# Altium PCB PCB2.PcbDoc
Units mil, origin at the board's own origin, x right, y up, seen from the top; angles counter-clockwise.
Board outline 6000 x 4000 mil, 2 copper layers (Top Layer, Bottom Layer); 91 components, 66 nets, 331 pads, 2 vias.
Unrouted connection lines stored in the file: 183.
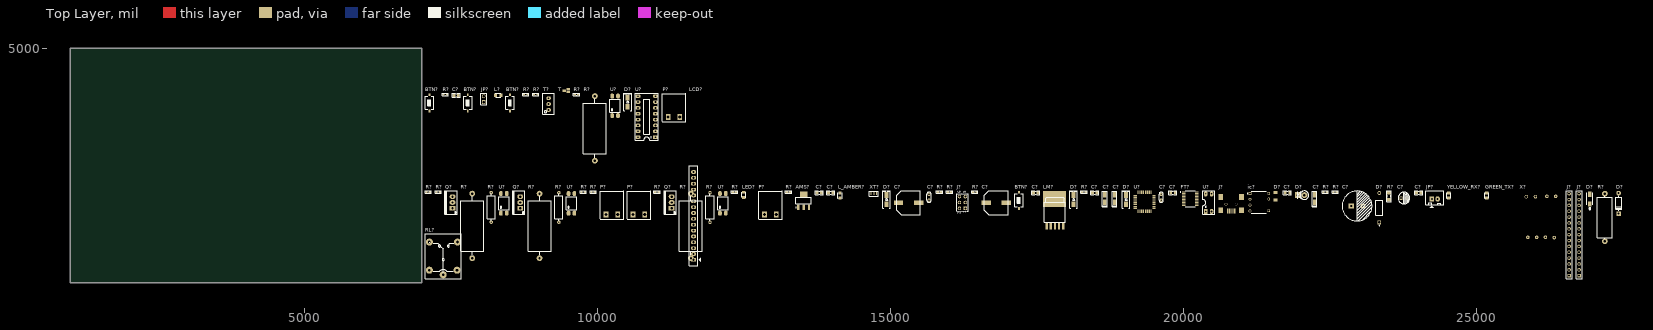
[diagram p0: Top Layer view]
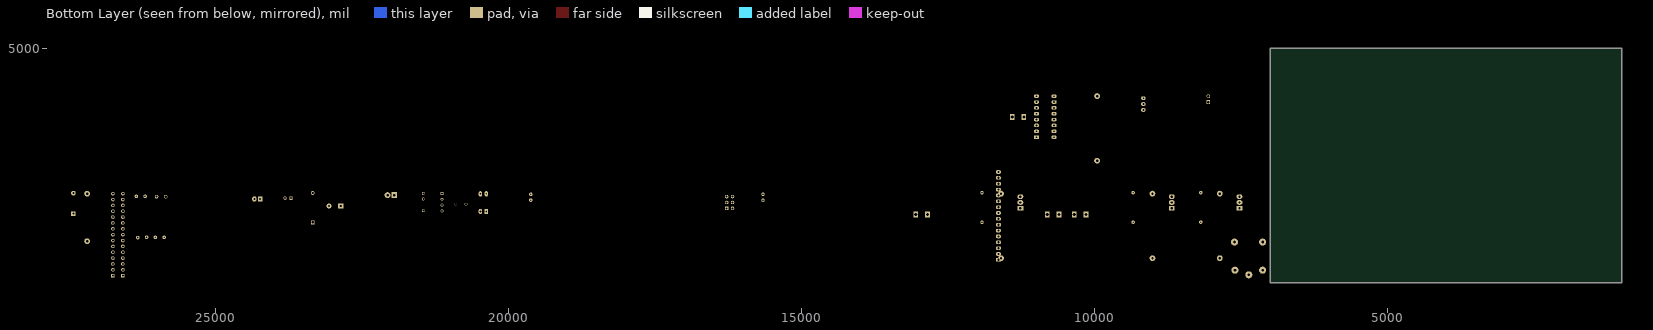
[diagram p1: Bottom Layer view, seen from below]

## Layer stack, top to bottom
Top Solder: solder mask 0.4, Solder Resist, Dk 3.5
Top Layer: signal copper 1.4
Dielectric 1: dielectric 12.6, FR-4, Dk 4.8
Bottom Layer: signal copper 1.4
Bottom Solder: solder mask 0.4, Solder Resist, Dk 3.5

## Board outline
1000,1000 7000,1000 7000,5000 1000,5000

## Design rules (kind name [scope] priority, off if disabled: settings)
Clearance [All] p1: gap=10 ignorepadtopadclearanceinfootprint=FALSE except(0: Arc-Hole Track-Hole SMDPad-Hole THPad-Hole Via-Hole Fill-Hole Poly-Hole Region-Hole Text-Hole)
PolygonConnect [All] p1: connectstyle=Relief reliefconductorwidth=10 reliefentries=4 polygonreliefangle="90 Angle" airgapwidth=10
RoomDefinition Sheet2 [InComponentClass('Sheet2')] p1: confinementstyle=ConfineIn formatcopy=TRUE lockcomponents=FALSE outline 7045,1060 27510,1060 27510,2680 7045,2680
RoutingVias [All] p1: holewidth=28 width=50 viastyle="Through Hole" minholewidth=28 minwidth=50 maxholewidth=28 maxwidth=50
SolderMaskExpansion [All] p1: expansion=4 istentingtop=FALSE
Width [All] p1: maxlimit=10 minlimit=10 preferedwidth=10
30 further rules are at their usual default settings.

## Classes and differential pairs
component class Sheet2: AMS? BTN? C? D? FT? GREEN_TX? ic? J? JP? L? L_AMBER? LCD? LED? LM? P? Q? R? RL? T T? U? X? XT? YELLOW_RX?

## Components (designator, comment, footprint, x,y, rotation, side; value= is the part's Value field where it differs from the comment)
AMS? "AMS1117-3.3V" SOT223 13520,2400 r0 top value="AMS1117-3.3V SOT223"
BTN? "Nut Nhan 2 Chan SMD 3x6x2.5" "Nut Nhan 2 Chan SMD 3x6x2.5" 8505,4070 r90 top
BTN? "Nut Nhan 2 Chan SMD 3x6x2.5" "Nut Nhan 2 Chan SMD 3x6x2.5" 7130,4070 r90 top
BTN? "Nut Nhan 2 Chan SMD 3x6x2.5" "Nut Nhan 2 Chan SMD 3x6x2.5" 7785,4070 r90 top
BTN? "Nut Nhan 2 Chan SMD 3x6x2.5" "Nut Nhan 2 Chan SMD 3x6x2.5" 17195,2405 r90 top
C? "104" "tu 0805" 7585,4200 r0 top
C? "0.1uF" "tu 0805" 24020,2535 r0 top
C? "0.1uF" "tu 0805" 18490,2535 r0 top
C? "15pF" "tu 0805" 13980,2535 r0 top
C? "4.7uF" "tu tantalum smd3216" 18830,2440 r90 top
C? "15pF" "tu 0805" 13785,2535 r0 top
C? "104" "tu gom" 19625,2460 r90 top
C? "106" "tu gom" 15660,2460 r90 top
C? "47uF" "tu hoa 5mm" 23770,2445 r0 top
C? "1000uF" "tu nhom 10 (G)" 16810,2365 r0 top
C? "470uF" "tu nhom 10 (G)" 15310,2365 r0 top
C? "4.7uF" "tu tantalum smd3216" 22245,2440 r90 top
C? "0.1uF" "tu 0805" 17480,2535 r0 top
C? "0.1uF" "tu 0805" 19825,2535 r0 top
C? "10uF" "tu hoa 13mm" 22970,2310 r0 top
C? "0.1uF" "tu 0805" 21780,2535 r0 top
C? "4.7uF" "tu tantalum smd3216" 18660,2440 r90 top
D? "M7" "DIODE SMA" 10515,4085 r90 top
D? "12V" "DIODE ZENNER SMD SOD80" 21575,2475 r90 top
D? "P6KE200A" DIOAD1276W78L760D360 23350,2280 r90 top
D? "1N4007" D1A 27435,2530 r90 top
D? "SS34" "DIODE SMA" 14935,2420 r90 top
D? "SS34" "DIODE SMA" 19025,2420 r90 top
D? "2A 1000v" "DIODE 2A DUNG" 22010,2495 r0 top
D? "MBRA160T3G" DIOM5226X220N 26945,2430 r90 top
D? "SS34" "DIODE SMA" 18130,2420 r90 top
FT? "FT232RL" PCM5101APW 3655,8600 r0 top
GREEN_TX? "LED2" LED-0805-Green 25185,2445 r90 top
ic? "TNY266_2" DIP762W46P254L957H406Q7 21290,2375 r0 top
J? "USB Micro 5p SMD" "USB Mini 5p SMD" 20815,2360 r0 top
J? "HEAD15-NOSS" HDR1X15 26590,1120 r90 top
J? "Header 3X2" HDR2X3 16280,2270 r90 top
J? "HEAD15-NOSS-1" HDR1X15 26760,1120 r90 top
JP? "JP 1x2 2.54" "JP 1x2 DT" 8055,4085 r90 top
JP? "JP2" CON2 24245,2430 r0 top value="Connector 2"
L? "LED 0805" LED-0805-Green 8260,4200 r0 top
L_AMBER? "LED3" LED-0805-Red 14140,2445 r90 top
LCD? "LCD1602 XL" "LCD1602 with Jump" 11640,1390 r90 top
LED? "BLUE" LED-0805-Blue 12495,2455 r90 top
LM? "LM2576 12V SMD" TO263-5 17810,2200 r0 top
P? "CON 2 EDG5.08" "CON 2 2EDG5.08" 11205,3830 r0 top
P? "CON 2 EDG5.08" "CON 2 2EDG5.08" 10605,2165 r0 top
P? "CON 2 EDG5.08" "CON 2 2EDG5.08" 12850,2165 r0 top
P? "CON 2 EDG5.08" "CON 2 2EDG5.08" 10145,2165 r0 top
Q? "IRFZ44" TO220 7525,2270 r90 top
Q? "IRFZ44" TO220 8680,2270 r90 top
Q? "IRFZ44" TO220 11265,2270 r90 top
R? "1k" "tro smd 0603" 7400,4215 r0 top
R? "680R" "tro cong suat 5w" 9955,3635 r90 top
R? "4.7k" "tro smd 0603" 8775,4215 r0 top
R? "4.7k" "tro smd 0603" 8945,4215 r0 top
R? "4.7k" "tro smd 0603" 9640,4215 r0 top
R? "1k" "tro smd 0603" 15840,2550 r0 top
R? "680R" "tro smd 0603" 16010,2550 r0 top
R? "680R" "tro smd 0603" 22425,2550 r0 top
R? "100R" "tro vach 1/2w" 8185,2285 r90 top
R? "10k" "tro smd 0603" 12340,2550 r0 top
R? "10k" "tro smd 0603" 9755,2550 r0 top
R? "680R" "tro cong suat 5w" 7860,1970 r90 top
R? "22R" "tro vach 2w" 27200,2115 r90 top
R? "100R" "tro vach 1/2w" 11920,2285 r90 top
R? "680R" "tro smd 0603" 22595,2550 r0 top
R? "10k" "tro smd 0603" 9925,2550 r0 top
R? "10k" "tro smd 0603" 7280,2550 r0 top
R? "1k" "tro smd 0603" 18305,2550 r0 top
R? "680R" "tro smd 0603" 13260,2550 r0 top
R? "1k" "tro smd 0603" 16440,2550 r0 top
R? "680R" "tro cong suat 5w" 11595,1970 r90 top
R? "1k" "tro smd 1206" 23515,2475 r90 top
R? "10k" "tro smd 0603" 7110,2550 r0 top
R? "100R" "tro vach 1/2w" 9340,2285 r90 top
R? "10k" "tro smd 0603" 11015,2550 r0 top
R? "680R" "tro cong suat 5w" 9010,1970 r90 top
RL? "Relay" "Relay 5 Chan SRD" 7365,1135 r90 top
T "BC847" SOT23 9465,4280 r90 top
T? "10K" "Bien Tro Vi Chinh Dung" 9165,4050 r90 top
U? "OPTO PC817 SMD" SOP4 10300,4020 r90 top value=PC817
U? "PCF8574" DIP16 10990,3485 r90 top
U? "OPTO PC817 DIP4" DIP4 20385,2215 r0 top value=PC817
U? "OPTO PC817 SMD" SOP4 8400,2355 r90 top value=PC817
U? "OPTO PC817 SMD" SOP4 12140,2355 r90 top value=PC817
U? "OPTO PC817 SMD" SOP4 9555,2355 r90 top value=PC817
U? "ATMEGA168-20AU" ATMEGA168 19345,2380 r0 top
X? "flyback tranformer" "flyback transformer" 25885,1775 r90 top
XT? "16Mhz" "Thach Anh 3 Chan SMD" 14670,2520 r0 top value=4Mhz
YELLOW_RX? "LED1" LED-0805-Yellow 24535,2445 r90 top

## Footprints (in the part's own frame and the unit in brackets; to place one, negate y for a bottom-side part, rotate by r counter-clockwise, add the part's x,y. Pads: shape width x height; smd on the part's side, far side on the other; paste and mask are expansions set on the pad)
ATMEGA168 [mil]
  rect 58x20 smd: 1(-167,110) 2(-167,79) 3(-167,47) 4(-167,16) 5(-167,-16) 6(-167,-47) 7(-167,-79) 8(-167,-110) 17(157,-110) 18(157,-79) 19(157,-47) 20(157,-16) 21(157,16) 22(157,47) 23(157,79) 24(157,110)
  rect 20x58 smd: 9(-115,-162) 10(-84,-162) 11(-52,-162) 12(-21,-162) 13(11,-162) 14(42,-162) 15(74,-162) 16(105,-162) 25(105,162) 26(74,162) 27(42,162) 28(11,162) 29(-21,162) 30(-52,162) 31(-84,162) 32(-115,162)
  body extent -182,-177 172,177, height 46
"Bien Tro Vi Chinh Dung" [mm] "Bien tro vi chinh"
  oval 1.6x2 hole 0.8: 1(-2.54,0) 2(0,0) 3(2.54,0)
  silkscreen extent -4.47,-2.54 4.6,2.54, body extent -4.54,-2.4 4.66,2.4, height 12.02
CON2 [mil] "CON2"
  rect 75x90 hole 34: 1(0,0)
  oval 75x90 hole 34: 2(100,0)
  silkscreen extent -100,-150 200,140, body extent -68,-70 168,107, height 236
"CON 2 2EDG5.08" [mm]
  rect 2x2.5 hole 1.4: 1(0,0) 2(5.08,0)
  silkscreen extent -2.54,-2.03 7.62,10.21, body extent -2.5,-1.75 7.58,10.25, height 3.15
D1A [mil] "Diode 1A, W 100mil, L 350mil"
  round 80 hole 35: 1(0,0)
  rect 80x80 hole 35: 2(-350,0)
  silkscreen extent -305,-50 -45,50, body extent -386,-33 34,36, height 84
DIOAD1276W78L760D360 [mm]
  round 1.59 hole 1.06: A(6.38,0)
  rect 1.59x1.59 hole 1.06: C(-6.38,0)
  silkscreen extent -7.89,-1.55 3.35,1.55, body extent -6.9,-1.8 6.9,1.8, height 3.6
"DIODE 2A DUNG" [mil] "Diode 2A DUNG"
  round 100 hole 45: 1(60,0)
  rect 100x100 hole 45: 2(-55,0)
  silkscreen extent -55,-72 132,72, body extent -69,-50 99,55, height 252
"DIODE SMA" [mm] "SMA"
  rect 2.5x1.7 smd: 1(-2,0) 2(2,0)
  silkscreen extent -3.68,-1.65 3.75,1.65, body extent -2.6,-1.37 2.6,1.37, height 2.4
"DIODE ZENNER SMD SOD80" [mm] "SOD80"
  rect 1.35x1.8 smd: 1(1.675,0) 2(-1.675,0)
  body extent -1.75,-0.76 1.75,0.74, height 1.45
DIOM5226X220N [mm]
  rect 2.3x1.55 smd: A(2.032,0) C(-2.15,0)
  silkscreen extent -4.62,-1.3 2.6,1.3, body extent -2.47,-1.49 2.73,1.24, height 2.7
DIP4 [mil] "W.300/L.400"
  rect 60x90 hole 31: 1(0,2.52)
  oval 60x90 hole 31: 2(100,2.52) 3(100,302.52) 4(0,302.52)
  silkscreen extent -50,-47 150,353, body extent -59,-7 159,307, height 170
DIP16 [mil] "16 PIN, W 300mil, Pin to pin 100mil"
  rect 60x90 hole 31: 1(0,0)
  oval 60x90 hole 31: 2(100,0) 3(200,0) 4(300,0) 5(400,0) 6(500,0) 7(600,0) 8(700,0) 9(700,300) 10(600,300) 11(500,300) 12(400,300) 13(300,300) 14(200,300) 15(100,300) 16(0,300)
  silkscreen extent -50,-50 750,350, body extent -52,-57 752,356, height 299
DIP762W46P254L957H406Q7 [mm]
  rect 1.25x1.25 hole 0.83: 1(-3.81,3.81)
  round 1.25 hole 0.83: 2(-3.81,1.27) 3(-3.81,-1.27) 4(-3.81,-3.81) 5(4.318,-3.683) 7(4.318,1.397) 8(4.318,3.81)
  silkscreen extent -5.02,-4.79 3.17,4.79, body extent -4.27,-4.59 4.78,4.85, height 4.06
"flyback transformer" [mil]
  round 60 hole 30: 1(0,0) 7(-5,-450) 8(700,-475) 19(0,-150) 20(0,-300) 23(695,-130) 24(700,-325)
  round 60 hole 40: 2(695,25)
  body extent -70,-599 796,149, height 561
HDR1X15 [mm] "Connector; Header; 15 Position"
  rect 1.5x1.5 hole 0.9: 1(0,0)
  round 1.5 hole 0.9: 2(2.54,0) 3(5.08,0) 4(7.62,0) 5(10.16,0) 6(12.7,0) 7(15.24,0) 8(17.78,0) 9(20.32,0) 10(22.86,0) 11(25.4,0) 12(27.94,0) 13(30.48,0) 14(33.02,0) 15(35.56,0)
  silkscreen extent -1.27,-1.27 36.83,1.27
HDR2X3 [mm] "Connector; Header; 3x2 Position"
  rect 1.5x1.5 hole 0.9: 1(0,0)
  round 1.5 hole 0.9: 2(0,2.54) 3(2.54,0) 4(2.54,2.54) 5(5.08,0) 6(5.08,2.54)
  silkscreen extent -1.27,-1.27 6.35,3.81
"JP 1x2 DT" [mm] "2 pins, 1 row, straight, gold plating"
  rect 1.6x1.6 hole 1.1: 1(0,0)
  round 1.6 hole 1.1: 2(2.54,0)
  silkscreen extent -1.27,-1.27 3.81,1.27, body extent -1.27,-1.27 3.81,1.27, height 8.54
"LCD1602 with Jump" [mil] "LCD dipslay 16x2, 16 pin"
  rect 62x90 hole 39: 1(0,0)
  oval 62x90 hole 39: 2(100,0) 3(200,0) 4(300,0) 5(400,0) 6(500,0) 7(600,0) 8(700,0) 9(800,0) 10(900,0) 11(1000,0) 12(1100,0) 13(1200,0) 14(1300,0) 15(1400,0) 16(1500,0)
  silkscreen extent -100,-125 1608,70, body extent -320,-1353 2850,84, height 764
LED-0805-Blue [mil]
  rect 50x55 smd: 1(0,0) 2(90,0)
  silkscreen extent 0,-35 90,35, body extent 5,-25 85,25, height 43
LED-0805-Green [mil]
  rect 50x55 smd: 1(0,0) 2(90,0)
  silkscreen extent 0,-35 90,35, body extent 5,-25 85,25, height 43
LED-0805-Red [mil]
  rect 50x55 smd: 1(0,0) 2(90,0)
  silkscreen extent 0,-35 90,35, body extent 5,-25 85,25, height 43
LED-0805-Yellow [mil]
  rect 50x55 smd: 1(0,0) 2(90,0)
  silkscreen extent 0,-35 90,35, body extent 5,-25 85,25, height 43
"Nut Nhan 2 Chan SMD 3x6x2.5" [mm] "Switch SMD type"
  rect 1.2x0.8 smd: 1(-3.5,0) 2(3.5,0)
  silkscreen extent -2.82,-1.85 2.82,1.85, body extent -3.05,-1.85 3.05,1.85, height 2.5
PCM5101APW [mm]
  rrect25% 1.57x0.41 smd: 1(415.341,-153.793) 2(415.341,-154.443) 3(415.341,-155.093) 4(415.341,-155.743) 5(415.341,-156.393) 6(415.341,-157.043) 7(415.341,-157.693) 8(415.341,-158.343) 9(415.341,-158.993) 10(415.341,-159.643) 11(421.081,-159.643) 12(421.081,-158.993) 13(421.081,-158.343) 14(421.081,-157.693) 15(421.081,-157.043) 16(421.081,-156.393) 17(421.081,-155.743) 18(421.081,-155.093) 19(421.081,-154.443) 20(421.081,-153.793)
  silkscreen extent 413.92,-160.17 420.41,-153.27, body extent 415.01,-159.97 421.41,-153.47, height 1.2
"Relay 5 Chan SRD" [mil] "Relay SPDT, 5 pin, 10A,W 650mil, L 800mil, H 800mil"
  round 120 hole 45: 1(0,0) 2(559.06,236.22) 3(559.06,-243.78) 4(78.74,-236.22) 5(78.74,236.22)
  silkscreen extent -63,-311 700,310, body extent -55,-306 697,304, height 602
SOP4 [mm]
  oval 2.25x1.6 smd: 1(-4.25,1.27) 2(-4.25,-1.27) 3(4.25,-1.27) 4(4.25,1.27)
  silkscreen extent -2.85,-2.3 2.85,2.3, body extent -4.67,-2.29 4.93,2.31, height 3.6
SOT23 [mm]
  rect 1x1.4 smd: 1(-0.635,-0.889) 2(0.635,-0.889) 3(0,0.889)
  body extent -0.3,-0.49 0.3,0.51, height 0.45
SOT223 [mm]
  rect 1x2.4 smd: 1(-2.3,-2.9) 2(0,-2.9) 3(2.3,-2.9)
  rect 3.3x2.4 smd: 4(0,2.9)
  silkscreen extent -3.47,-3.02 3.35,1.4, body extent -3.25,-3.56 3.25,3.4, height 1.68
"Thach Anh 3 Chan SMD" [mm] "SMD Crystal CMR309T package"
  rrect25% 0.45x1.35 smd: 1(0,0) 2(1.2,0) 3(2.4,0)
  silkscreen extent -0.76,-1.14 3.05,1.14, body extent -0.41,-0.63 2.79,0.67, height 1.02
TO220 [mil] "TO-220"
  rect 80x100 hole 39: 1(0,0)
  oval 80x100 hole 39: 2(100,0) 3(200,0)
  silkscreen extent -100,-76 300,130, body extent -95,-80 295,97, height 323
TO263-5 [mil] "TO263-5"
  rect 39.37x120 smd: 1(-140,-230) 2(-70,-230) 3(0,-230) 4(70,-230) 5(140,-230)
  rect 393.7x275.59 smd: 6(-5,230)
  silkscreen extent -180,-170 180,260, body extent -200,-242 200,310, height 180
"tro cong suat 5w" [mm]
  round 2.5 hole 1: 1(-14,0) 2(14,0)
  silkscreen extent -12.7,-5 12.83,5, body extent -14.34,-5 14.35,5, height 9
"tro smd 0603" [mm] "Chip Capacitor, 2-Leads, Body 1,60x0,80mm, IPC Medium Density"
  rect 1x0.95 smd mask+0.076: 1(-0.75,0) 2(0.75,0)
  silkscreen extent -1.35,-0.58 1.37,0.58, body extent -0.82,-0.42 0.82,0.43, height 0.44
"tro smd 1206" [mm]
  rect 1.5x1.6 smd: 1(-1.5,0) 2(1.5,0)
  silkscreen extent -2.44,-0.99 2.44,0.99, body extent -1.6,-0.8 1.6,0.8, height 0.6
"tro vach 1/2w" [mm]
  round 1.5 hole 0.7: 1(-6.4,0) 2(6.4,0)
  silkscreen extent -5.84,-1.75 5.84,1.75, body extent -6.62,-1.75 6.62,1.75, height 3.5
"tro vach 2w" [mm]
  round 2.5 hole 1.1: 1(-10.3,0) 2(10.3,0)
  silkscreen extent -9.27,-3.25 9.14,3.25, body extent -10.56,-2.5 10.56,2.5, height 5.5
"tu 0805" [mm] "Compoment SMD 80x50mil"
  rect 1.2x1.4 smd: 1(-0.946,-0.003) 2(0.954,-0.003)
  silkscreen extent -1.75,-0.89 1.75,0.89, body extent -1.01,-0.64 1.01,0.63, height 0.61
"tu gom" [mm] "Tu gom mini"
  round 1.5 hole 0.7: 1(-1.27,0) 2(1.27,0)
  silkscreen extent -2.25,-0.97 2.22,0.97, body extent -2.92,-0.85 2.92,0.85, height 6.12
"tu hoa 5mm" [mm]
  rect 1.3x1.5 hole 0.8: 1(-1.27,0)
  oval 1.3x1.5 hole 0.8: 2(1.27,0)
  silkscreen extent -2.51,-2.51 2.51,2.51, body extent -3.12,-3.18 3.23,3.18, height 14.55
"tu hoa 13mm" [mm]
  rect 2.2x2.2 hole 0.9: 1(-2.54,0)
  round 2.2 hole 0.9: 2(2.54,0)
  silkscreen extent -6.5,-6.5 6.5,6.5, body extent -6.25,-6.25 6.26,6.25, height 23.02
"tu nhom 10 (G)" [mm]
  rect 4.1x2 smd: 1(-4.35,0) 2(4.35,0)
  silkscreen extent -5.15,-5.15 5.15,5.15, body extent -5.9,-5.25 5.9,5.25, height 10.5
"tu tantalum smd3216" [mm]
  rect 2.5x1.5 smd: 1(-1.7,0) 2(1.7,0)
  silkscreen extent -3.61,-1 3.17,1, body extent -1.7,-0.9 1.7,0.9, height 1.69
"USB Mini 5p SMD" [mm]
  rect 0.5x2.25 smd: 1(1.651,-3.429) 2(0.864,-3.442) 3(0.076,-3.454) 4(-0.711,-3.467) 5(-1.499,-3.48)
  rect 2x2.5 smd: 5(-4.424,-3.124) 5(-4.42,2.616) 5(4.576,-3.124) 5(4.58,2.616)
  body extent -5.27,-3.8 5.43,5.4, height 3.95

## Part data
AMS?: library part "AMS1117 SMD", "Dán", Chung_Loai=Dán, Don_Vi=Con, Ma_Hang=MH000596
C?: library part "Tu 0805 104 50V 10%", "Dán", Chung_Loai=Dán, Don_Vi=Con, Ma_Hang=MH004551, So_Chan=2, Ten_Linh_Kien="Tụ 0805 104-100nF 10% 50V"
C? C? C? C? C?: library part "Tu 0805 10pF 50V 10%", "Dán", Chung_Loai=Dán, Don_Vi=Con, Ma_Hang=MH004554, So_Chan=2, Ten_Linh_Kien="Tụ 0805 10P 10% 50V"
C? C?: library part "Tu 0805 15pF 50V 10%", "Dán", Chung_Loai=Dán, Don_Vi=Con, Ma_Hang=MH004556, So_Chan=2, Ten_Linh_Kien="Tụ 0805 15P 10% 50V"
C? C? C?: library part "Tu tantalum 4.7uF 16V SMD3216", "Dán", Chung_Loai=Dán, Don_Vi=Con, Ma_Hang=MH008686, So_Chan=2, Ten_Linh_Kien="Tụ tantalum 475C-4.7uF 16V SMD3216"
C? C?: library part "Tu gom 104 50V", "Cắm", Chung_Loai=Cắm, Don_Vi=Con, Ma_Hang=MH004761, So_Chan=2, Ten_Linh_Kien="Tụ gốm 104 100nF 50V"
C?: library part "Tu Hoa 47uF 25V 5x8", "Cắm", Chung_Loai=Cắm, Don_Vi=Con, Ma_Hang=MH006860, So_Chan=2, Ten_Linh_Kien="Tụ Hóa 47uF 25V"
C?: library part "Tu Nhom 1000uF 10V", "Dán", Chung_Loai=Dán, Don_Vi=Con, Ma_Hang=MH007515, So_Chan=2, Ten_Linh_Kien="Tụ Nhôm 1000uF 10V"
C?: library part "Tu Nhom 470uF 35V", "Dán", Chung_Loai=Dán, Don_Vi=Con, Ma_Hang=MH004418, So_Chan=2, Ten_Linh_Kien="Tụ Nhôm 470uF 35V 10x10.5MM"
C?: library part "Tu Hoa 10uF 450V 13x20", "Cắm", Chung_Loai=Cắm, Don_Vi=Con, Ma_Hang=MH003950, So_Chan=2, Ten_Linh_Kien="Tụ Hóa 10uF 450V 13x20MM"
D?: library part "Diode M7 ( 4007 )", "Dán", Chung_Loai=Dán, Don_Vi=Con, Ma_Hang=MH000944, Ten_Linh_Kien="Diode M7 1N4007 SMD 1A 1000V"
D?: library part "Diode Zener 12V", "Dán", Chung_Loai=Dán, Don_Vi=Con, Ma_Hang=MH000945, Ten_Linh_Kien="Diode Zener 1/2W 12V SMD1206 ZMM12"
D?: "600W, 200V, 5%, Unidirectional, TVS", Package="AXIAL-2 Taiwan Semiconductor", Availability="In Stock", MF="Taiwan Semiconductor", MP=P6KE200A, Price=None, Purchase-URL=https://pricing.snapeda.com/search/part/P6KE200A/?ref=eda
D?: library part D1A, "Diode 1A"
D? D? D?: library part "Diode SS34 ( 1N5822 )", "Dán", Chung_Loai=Dán, Don_Vi=Con, Ma_Hang=MH002104, Ten_Linh_Kien="Diode SS34 3A 40V SMA ( 1N5822 SS34A)"
D?: library part "Diode FR207", "Cắm", Chung_Loai=Cắm, Don_Vi=Con, Ma_Hang=MH005704, Ten_Linh_Kien="Diode FR207 2A 1000V ( DIP)"
D?: "Diode Schottky 60V 1A Surface Mount SMA", Package="DO-214 ON Semiconductor", Availability=Unavailable, MF="ON Semiconductor", MP=MBRA160T3G, Price=None, SnapEDA_Link=https://www.snapeda.com/parts/MBRA160T3G/ON%20Semiconductor/view-part/313183/?ref=snap
GREEN_TX? L?: library part "LED 0805 Xanh La", "Dán", Chung_Loai=Dán, Don_Vi=Con, Ma_Hang=MH002326, Ten_Linh_Kien="LED 0805 Màu Xanh Lá (Green)"
J?: "USB Type B", Ma_Hang=MH001020, Ten="MicroUSB MK5P SMD"
J? J?: library part "Header 15", "Header, 15-Pin", LatestRevisionDate=17-Jul-2002, LatestRevisionNote="Re-released for DXP Platform.", Publisher="Altium Limited"
J?: "Header, 3-Pin, Dual row", LatestRevisionDate=17-Jul-2002, LatestRevisionNote="Re-released for DXP Platform.", Publisher="Altium Limited"
JP?: library part "JP 1x2 2.54 Duc Thang", "Cắm", Chung_Loai=Cắm, Don_Vi=Con, Ma_Hang=MH000903, Ten_Linh_Kien="Jump Đơn Đực 2.54MM 1x40P Thẳng 11MM"
JP?: library part Con2, "Connector 2"
L_AMBER?: library part "LED 0805 Do", "Dán", Chung_Loai=Dán, Don_Vi=Con, Ma_Hang=MH000897, Ten_Linh_Kien="LED 0805 Màu Đỏ (Red)"
LCD?: "LCD 1602 Xanh Lá", CHIP=HD44780, Ma_Hang=67HZ, NCC=NSHOP, Ten="Màn hình LCD 1602 Xanh Lá"
LED?: library part "LED 0805 Xanh Duong", "Dán", Chung_Loai=Dán, Don_Vi=Con, Ma_Hang=MH002327, Ten_Linh_Kien="LED 0805 Màu Xanh Dương (Blue)"
LM?: "Dán", Chung_Loai=Dán, Don_Vi=Con, Ma_Hang=MH002369, Ten_Linh_Kien="LM2576HVS-12V BUCK 12V 3A TO263-5"
P? P? P? P?: "Cắm", Chung_Loai=Cắm, Don_Vi=Con, Ma_Hang=MH000759, Ten_Linh_Kien="CON 2 2EDG5.08-2P 5.08MM ( Xanh Cong)"
Q? Q? Q?: library part "IRFZ44 DIP", "N-Channel Power MOSFET"
R? R? R? R?: library part "Tro 0603 1% 1k", "Dán", Chung_Loai=Dán, Don_Vi=Con, Ma_Hang=MH006334, So_Chan=2, Ten_Linh_Kien="Trở 0603 1% 1k"
R? R? R? R?: library part "Tro Cong Suat 5W 5% 680R", "Cắm", Chung_Loai=Cắm, Don_Vi=Con, Ma_Hang=MH007107, So_Chan=2, Ten_Linh_Kien="Trở Sứ 5w 5% 680R"
R? R? R?: library part "Tro 0603 5% 4.7k", "Dán", Chung_Loai=Dán, Don_Vi=Con, Ma_Hang=MH006327, So_Chan=2, Ten_Linh_Kien="Trở 0603 5% 4.7k"
R? R? R? R?: library part "Tro 0603 1% 680R", "Dán", Chung_Loai=Dán, Don_Vi=Con, Ma_Hang=MH006336, So_Chan=2, Ten_Linh_Kien="Trở 0603 1% 680R"
R? R? R?: library part "Tro Vach 1/2W 5% 100R", "Cắm", Chung_Loai=Cắm, Don_Vi=Con, Ma_Hang=MH007106, So_Chan=2, Ten_Linh_Kien="Trở 5% 1/2w 100R"
R? R? R? R? R? R?: library part "Tro 0603 1% 10k", "Dán", Chung_Loai=Dán, Don_Vi=Con, Ma_Hang=MH006333, So_Chan=2, Ten_Linh_Kien="Trở 0603 1% 10k"
R?: library part "Tro Vach 2W 5% 22R", "Cắm", Chung_Loai=Cắm, Don_Vi=Con, Ma_Hang=MH006369, So_Chan=2, Ten_Linh_Kien="Trở 5% 2w 22R"
R?: library part "Tro 1206 1% 1k", "Dán", Chung_Loai=Dán, Don_Vi=Con, Ma_Hang=MH005880, So_Chan=2, Ten_Linh_Kien="Trở 1206 1% 1k"
RL?: library part "Relay 5 Chan SRD", "Relay 5 Chan", Ma_Hang=MH009374, Ten="Relay 5V10A SRD-05VDC-SL-C Chính Hãng"
T: "Bipolar _BJT_ Transistor NPN 45V 100mA 100MHz 150mW Surface Mount SOT-523", Package="SOT-523 Rectron", Availability=Unavailable, MF=Rectron, MP=BC847, Price=None, SnapEDA_Link=https://www.snapeda.com/parts/BC847/Rectron/view-part/4637030/?ref=snap
T?: library part "Bien Tro Tinh Chinh 10K Dung", "Cắm", Chung_Loai=Cắm, Don_Vi=Con, Ma_Hang=MH003232, Ten_Linh_Kien="Biến Trở VR 103-10K 3296W"
U? U? U? U? U?: "Single Opto"
U?: "I2C PORT EXPANDER", Frequency - Clock=100KHz, Manufacturer="NXP Semiconductors", Manufacturer Part Number=PCF8574T/3,512, Operating Temperature="-40°C ~ 85°C", Package / Case="16-SOIC (7.5mm Width)", Supplier Part Number=568-1076-5-ND, Voltage - Supply="2.5 V ~ 6 V", Category="Integrated Circuits (ICs)", Includes=POR, Interface=I²C, Interrupt Output=Yes, Number of I /O=8, Packaging=Tube, RoHS="RoHS Compliant", Supplier=Digi-Key, Supplier 1=Digi-Key, Supplier Part Number 1=568-1076-5-ND
U?: "AVR AVRÂ® ATmega Microcontroller IC 8-Bit 20MHz 16KB _8K x 16_ FLASH 32-TQFP _7x7_", Package="TQFP-32 Microchip", Availability=Unavailable, MF=Microchip, MP=ATMEGA168-20AU, Price=None, SnapEDA_Link=https://www.snapeda.com/parts/ATMEGA168-20AU/Microchip/view-part/776709/?ref=snap
XT?: library part "Thach anh 3 Chan SMD", "Crystal For all Crystal 2pin."
YELLOW_RX?: library part "LED 0805 Vang", "Dán", Chung_Loai=Dán, Don_Vi=Con, Ma_Hang=MH002329, Ten_Linh_Kien="LED 0805 Màu Vàng ( Yellow)"
BTN? BTN? BTN? BTN?: Ma_Hang=MH001036, Ten="Nút Nhấn 2 Chân 3x6x2.5MM SMD"

## Via types
v1: diameter 47.24, hole 39.37, Top Layer to Bottom Layer, 2 vias

## Nets (pads, with @x,y where several pads share a name; then routed paths per layer and width w, separated by ;. In a path a pad name is that pad's centre, name@x,y a point inside that pad or via, vN(x,y) a via of type N, cw(c..) or ccw(c..) an arc to the next point about the centre after c; other vN are vias at no path point)
3V3: C?.1@19787.77,2534.87 FT?.17 J?.14@26760,2420
220_1: D?.1@27435,2530 JP?.2@24345,2430 RL?.2
220_2: C?.1@19625,2410 C?.2@23070,2310 ic?.2 ic?.3 ic?.7 ic?.8 JP?.1@24245,2430 P?.2@11405,3830 U?.3@20485,2517.52
+5: AMS?.1 BTN?.1 C?.1@7547.77,4199.87 C?.1@15138.74,2365 C?.1@16638.74,2365 C?.1@18452.77,2534.87 C?.1@18660,2373.07 C?.1@18830,2373.07 C?.1@21742.77,2534.87 C?.1@23720,2445 C?.2@7622.57,4199.87 C?.2@13822.57,2534.87 C?.2@14017.57,2534.87 C?.2@15660,2510 C?.2@16981.26,2365 C?.2@17517.57,2534.87 C?.2@18527.57,2534.87 C?.2@18660,2506.93 C?.2@18830,2506.93 C?.2@19862.57,2534.87 C?.2@22245,2506.93 C?.2@23820,2445 D?.1@14935,2341.26 D?.2@10515,4163.74 D?.2@18130,2498.74 D?.C@26945,2345.35 FT?.7 FT?.18 J?.2@26760,1220 J?.4@26590,1420 J?.5@20640.83,2237 J?.5@20641,2463 J?.5@20756,2223 J?.5@20995.17,2237 J?.5@20995.33,2463 J?.6@16180,2470 JP?.1@8055,4085 L?.1 L_AMBER?.2 LCD?.1 LCD?.2 LED?.2 LM?.1 LM?.3 LM?.5 P?.2@10345,2165 P?.2@10805,2165 P?.2@13050,2165 Q?.3 R?.1@8745.47,4215 R?.1@8915.47,4215 R?.1@9725.47,2550 R?.1@9895.47,2550 R?.1@12310.47,2550 R?.1@23515,2415.94 R?.2@7139.53,2550 R?.2@7309.53,2550 R?.2@7429.53,4215 R?.2@11044.53,2550 R?.2@18334.53,2550 RL?.5 T.2 T?.1 T?.3 U?.1@10990,3485 U?.2@8450,2187.68 U?.2@9605,2187.68 U?.2@10990,3585 U?.2@12190,2187.68 U?.2@20485,2217.52 U?.3@8450,2522.32 U?.3@9605,2522.32 U?.3@10350,4187.32 U?.3@10990,3685 U?.3@12190,2522.32 U?.3@19178,2427 U?.4@19178,2396 U?.5@19178,2364 U?.6@19178,2333 U?.8@10990,4185 U?.16@10690,3485 U?.18 U?.21 X?.8
+5V: D?.2@19025,2498.74 FT?.4 FT?.20 GREEN_TX?.1 J?.2@16180,2270 J?.4@26760,1420 YELLOW_RX?.1
A: JP?.2@8055,4185 LCD?.15
A0: J?.5@26760,1520 U?.23
A1: J?.6@26760,1620 U?.24
A2: J?.7@26760,1720 U?.25
A3: J?.8@26760,1820 U?.26
A4: J?.9@26760,1920 U?.27
A5: J?.10@26760,2020 U?.28
A6: J?.11@26760,2120 U?.19
A7: J?.12@26760,2220 J?.13@26760,2320 U?.22
AREF: C?.1@17442.77,2534.87 U?.20
CS: LCD?.6 U?.6@10990,3985
D0/RX: J?.2@26590,1220 R?.2@16469.53,2550 U?.30
D1/TX: J?.1@26590,1120 R?.2@15869.53,2550 U?.31
D2: J?.5@26590,1520 U?.32
D3: J?.6@26590,1620 U?.1@19178,2490
D4: J?.7@26590,1720 U?.2@19178,2459
D5: J?.8@26590,1820 U?.9@19230,2218
D6: J?.9@26590,1920 U?.10@19261,2218
D7: J?.10@26590,2020 U?.11@19293,2218
D8: J?.11@26590,2120 U?.12@19324,2218
D9: J?.12@26590,2220 U?.13@19356,2218
D10: J?.13@26590,2320 U?.14@19387,2218
D11/MOSI: J?.4@16180,2370 J?.14@26590,2420 U?.15@19419,2218
D12/MISO: J?.1@16280,2270 J?.15@26590,2520 U?.16@19450,2218
D13/SCK: J?.3@16280,2370 J?.15@26760,2520 R?.1@15980.47,2550 U?.17
DB4: LCD?.11 U?.9@10690,4185
DB5: LCD?.12 U?.10@10690,4085
DB6: LCD?.13 U?.11@10690,3985
DB7: LCD?.14
DP7: U?.12@10690,3885
K: LCD?.16 T.3
NetAMS?_2: AMS?.2 AMS?.4 R?.1@13230.47,2550
NetC?_1: C?.1@23982.77,2534.87 FT?.2
NetC?_2: C?.2@19625,2510 D?.1@22070,2495 ic?.1 ic?.4 ic?.5 U?.4@20385,2517.52 X?.7
NetD?_1: D?.1@21575,2540.94 U?.1@20385,2217.52
NetD?_2: D?.2@27435,2180 R?.1@27200,1709.49
NetD?_A: D?.A@26945,2510 X?.2
NetFT?_15: FT?.15 J?.3@20818,2224
NetFT?_16: FT?.16 J?.2@20849,2224.5
NetFT?_22: R?.1@22565.47,2550
NetFT?_23: R?.1@22395.47,2550
NetGREEN_TX?_2: GREEN_TX?.2 R?.2@22624.53,2550
NetL?_2: L?.2 R?.1@7370.47,4215
NetL_AMBER?_1: L_AMBER?.1 R?.2@16039.53,2550
NetLED?_1: LED?.1 R?.2@13289.53,2550
NetP?_1: P?.1@12850,2165 Q?.2@11265,2370
NetQ?_1: Q?.1@11265,2270 R?.1@10985.47,2550 R?.2@11920,2536.97
NetR?_1: R?.1@9340,2033.03 R?.2@9954.53,2550 U?.4@9505,2522.32
NetR?_2: R?.2@22454.53,2550 YELLOW_RX?.2
P3: R?.2@9669.53,4215 T.1 U?.7@10990,4085
RESET: BTN?.2@17195,2542.8 C?.2@24057.57,2534.87 J?.3@26590,1320 J?.3@26760,1320 J?.5@16280,2470 R?.1@18275.47,2550 U?.29
RS: LCD?.4
RW: LCD?.5 U?.5@10990,3885
RX: FT?.5 R?.1@16410.47,2550
SCL: R?.2@8804.53,4215 U?.14@10690,3685
SDA: R?.2@8974.53,4215
SR: U?.4@10990,3785
TX: FT?.1 R?.1@15810.47,2550
VIN: AMS?.3 J?.1@26760,1120
VO: LCD?.3 T?.2
VUSB: C?.1@22245,2373.07 C?.2@21817.57,2534.87 D?.1@19025,2341.26 J?.1@20880,2225
pads on no net: BTN?.2@7130,4207.8 BTN?.2@7785,4207.8 BTN?.2@8505,4207.8 C?.1@13747.77,2534.87 C?.1@13942.77,2534.87 C?.1@15660,2410 C?.1@22870,2310 C?.2@15481.26,2365 D?.1@10515,4006.26 D?.1@18130,2341.26 D?.2@14935,2498.74 D?.2@21575,2409.06 D?.2@21955,2495 D?.A@23350,2531.18 D?.C@23350,2028.82 FT?.3 FT?.6 FT?.8 FT?.9 FT?.10 FT?.11 FT?.12 FT?.13 FT?.14 FT?.19 J?.4@20787,2223.5 LCD?.7 LCD?.8 LCD?.9 LCD?.10 LM?.2 LM?.4 LM?.6 P?.1@10145,2165 P?.1@10605,2165 P?.1@11205,3830 Q?.1@7525,2270 Q?.1@8680,2270 Q?.2@7525,2370 Q?.2@8680,2370 R?.1@7080.47,2550 R?.1@7250.47,2550 R?.1@7860,1418.82 R?.1@8185,2033.03 R?.1@9010,1418.82 R?.1@9610.47,4215 R?.1@9955,3083.82 R?.1@11595,1418.82 R?.1@11920,2033.03 R?.2@7860,2521.18 R?.2@8185,2536.97 R?.2@9010,2521.18 R?.2@9340,2536.97 R?.2@9784.53,2550 R?.2@9955,4186.18 R?.2@11595,2521.18 R?.2@12369.53,2550 R?.2@23515,2534.06 R?.2@27200,2520.51 RL?.1 RL?.3 RL?.4 U?.1@8350,2187.68 U?.1@9505,2187.68 U?.1@10250,3852.68 U?.1@12090,2187.68 U?.2@10350,3852.68 U?.4@8350,2522.32 U?.4@10250,4187.32 U?.4@12090,2522.32 U?.7@19178,2301 U?.8@19178,2270 U?.13@10690,3785 U?.15@10690,3585 X?.1 X?.19 X?.20 X?.23 X?.24 XT?.1 XT?.2 XT?.3
copper on no net:
  other v1: 20731.39,2338.57 20904.61,2338.57

## Text inside footprints (layer, text, board x,y; h text height)
J?: Top Overlay "6" at 16200,2530 h50 r90; Top Overlay "5" at 16300,2530 h50 r90; Top Overlay "2" at 16200,2170 h50 r90; Top Overlay "1" at 16300,2190 h50 r90